# Altium PCB NL_RGB2.0.PcbDoc
Units mil, origin at the board's own origin, x right, y up, seen from the top; angles counter-clockwise.
Board outline 2598.43 x 2598.43 mil, 2 copper layers (Top Layer, Bottom Layer); 18 components, 40 nets, 56 pads, 35 vias.
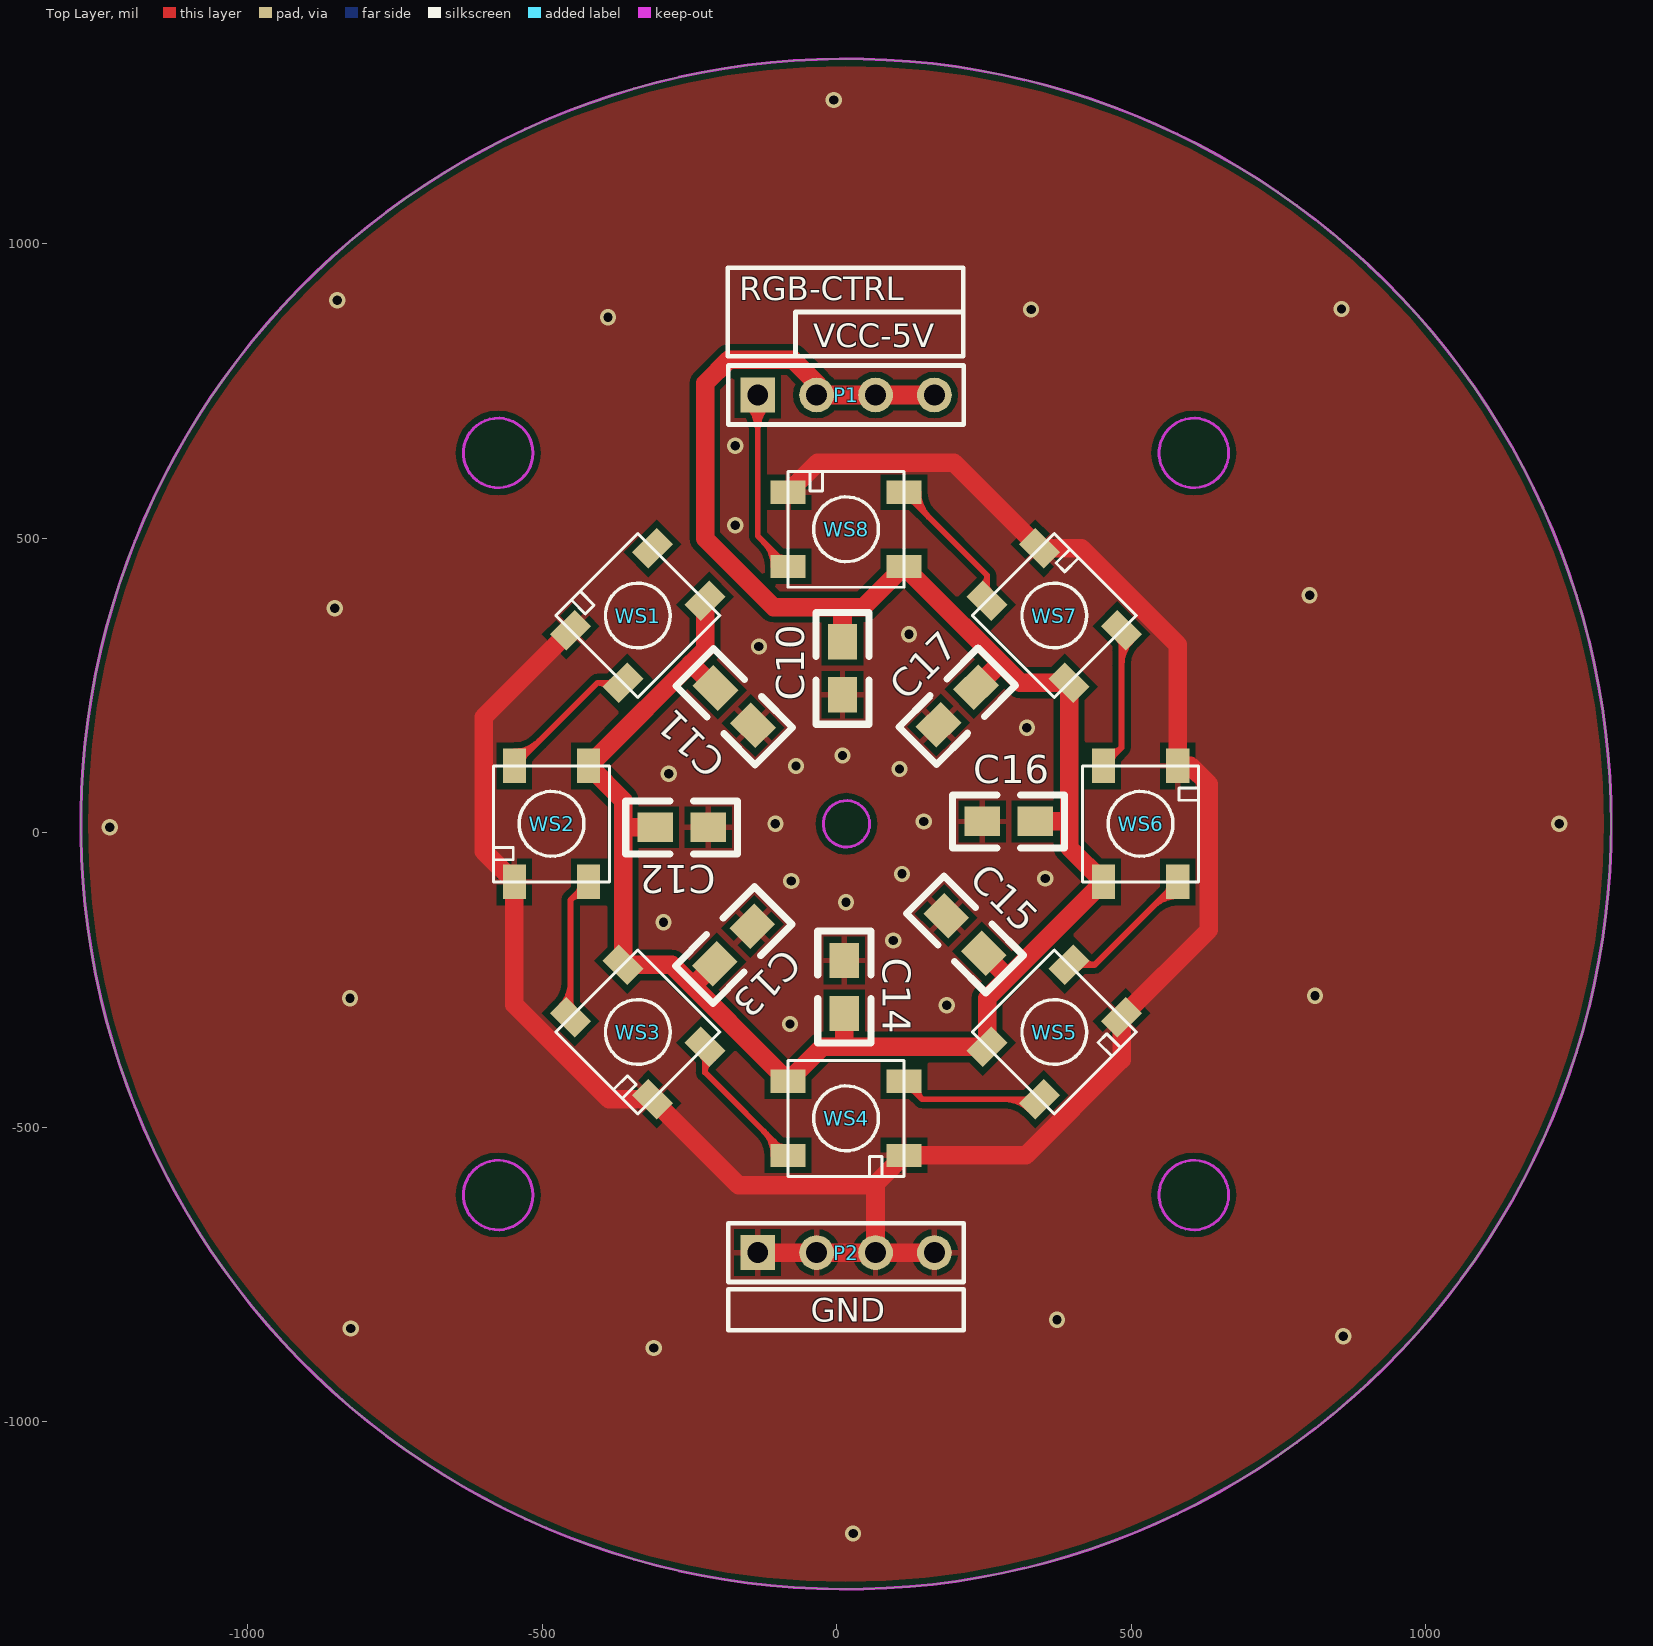
[diagram p0: Top Layer view]
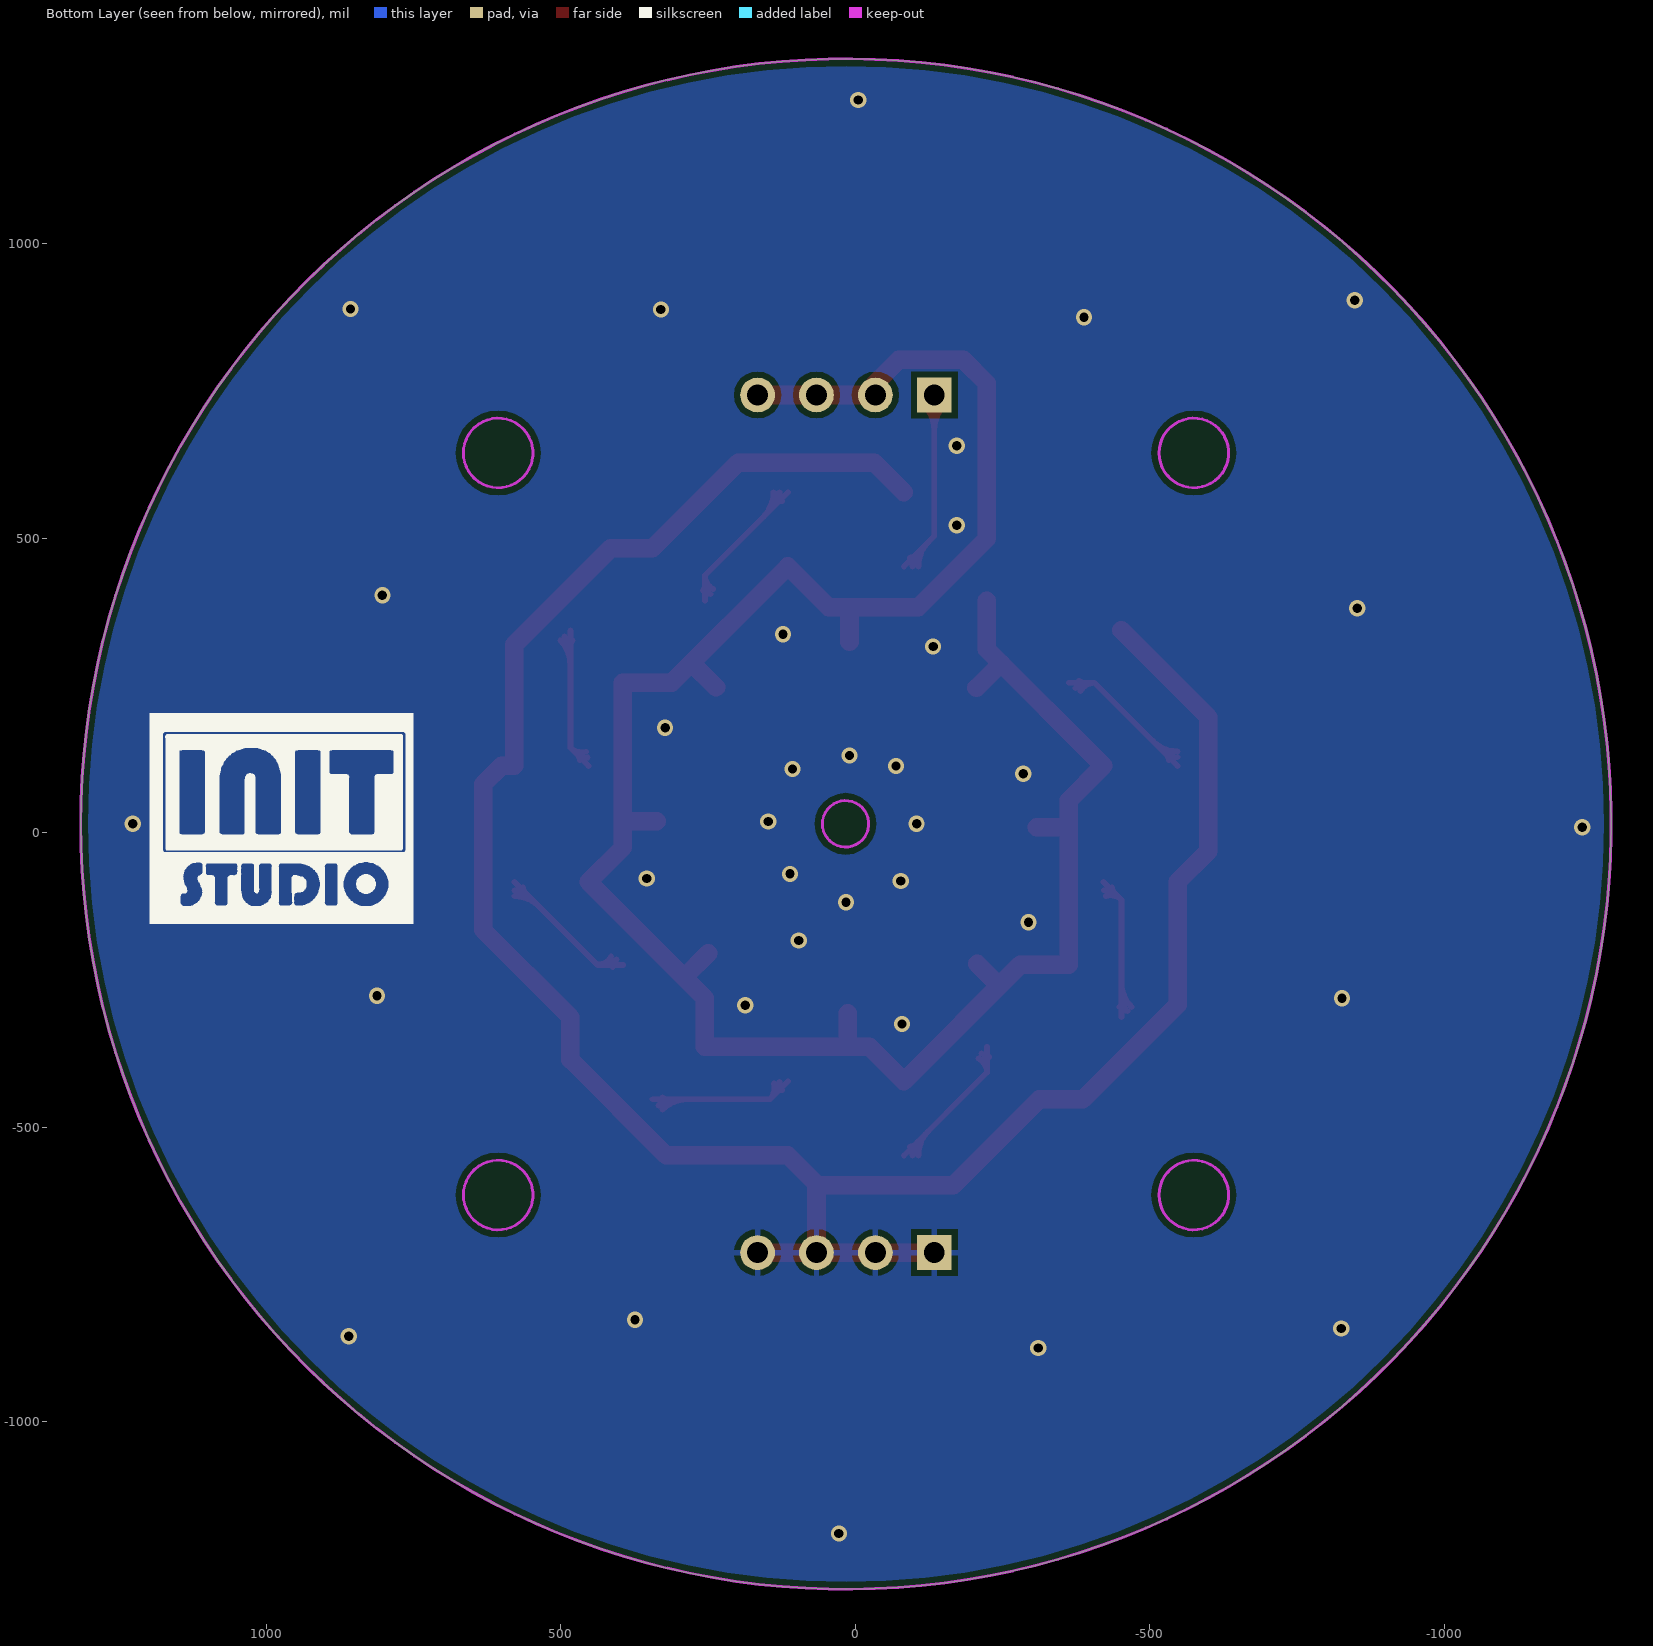
[diagram p1: Bottom Layer view, seen from below]

## Layer stack, top to bottom
Top Solder: solder mask 0.4, Solder Resist, Dk 3.5
Top Layer: signal copper 1.4
Dielectric1: dielectric 12.6, FR-4, Dk 4.8
Bottom Layer: signal copper 1.4
Bottom Solder: solder mask 0.4, Solder Resist, Dk 3.5

## Board outline
-1283.31,14.68 ccw(c15.91,14.68) 15.91,-1284.54 ccw(c15.91,14.68) 1315.12,14.68 ccw(c15.91,14.68) 15.91,1313.89 ccw(c15.91,14.68)

## Design rules (kind name [scope] priority, off if disabled: settings)
Clearance [All] p1: gap=10
ComponentClearance [All] p1: gap=0 collisioncheckmode=3 verticalgap=0 showdistances=FALSE
PolygonConnect PolygonConnect_1 [IsVia] p1: connectstyle=Direct reliefconductorwidth=10 reliefentries=4 polygonreliefangle="90 Angle" airgapwidth=10
PolygonConnect [All] p2: connectstyle=Relief reliefconductorwidth=10 reliefentries=4 polygonreliefangle="90 Angle" airgapwidth=10
RoutingVias [All] p1: holewidth=28 width=50 viastyle="Through Hole" minholewidth=28 minwidth=50 maxholewidth=28 maxwidth=50
SilkToSolderMaskClearance SilkscreenOverComponentPads [IsPad] p1: minsilkscreentomaskgap=10 clearancetoexposedcopper=TRUE
SolderMaskExpansion [All] p1: expansion=4
Width [All] p1: maxlimit=39.37 minlimit=10 preferedwidth=10
28 further rules are at their usual default settings.

## Components (designator, comment, footprint, x,y, rotation, side; value= is the part's Value field where it differs from the comment)
C10 "Cap" 0805 10,234 r90 top
C11 "Cap" 0805 -142,182 r135 top
C12 "Cap" 0805 -218,9 r180 top
C13 "Cap" 0805 -143,-159 r225 top
C14 "Cap" 0805 13,-217 r270 top
C15 "Cap" 0805 186,-141 r315 top
C16 "Cap" 0805 247,19 r0 top
C17 "Cap" 0805 173,183 r45 top
P1 "Header 4" HDR1X4 -134,743 r0 top
P2 "Header 4" HDR1X4 -134,-713 r0 top
WS1 "WS2812" WS2812 -337.55,368.55 r225 top
WS2 "WS2812" WS2812 -484,15 r270 top
WS3 "WS2812" WS2812 -337.55,-338.55 r315 top
WS4 "WS2812" WS2812 16,-485 r0 top
WS5 "WS2812" WS2812 369.55,-338.55 r45 top
WS6 "WS2812" WS2812 516,15 r90 top
WS7 "WS2812" WS2812 369.55,368.55 r135 top
WS8 "WS2812" WS2812 16,515 r180 top

## Footprints (in the part's own frame and the unit in brackets; to place one, negate y for a bottom-side part, rotate by r counter-clockwise, add the part's x,y. Pads: shape width x height; smd on the part's side, far side on the other; paste and mask are expansions set on the pad)
0805 [mil]
  rect 60x50 smd: 1(0,0) 2(90,0)
  silkscreen extent -50,-45 140,45
HDR1X4 [mm] "Connector; Header; 4 Position"
  rect 1.5x1.5 hole 0.9: 1(0,0)
  round 1.5 hole 0.9: 2(2.54,0) 3(5.08,0) 4(7.62,0)
  silkscreen extent -1.27,-1.27 8.89,1.27
WS2812 [mm]
  rect 1.5x1 smd: 1(-2.5,1.6) 2(-2.5,-1.6) 3(2.5,-1.6) 4(2.5,1.6)
  silkscreen extent -2.5,-2.5 2.5,2.5

## Part data
C10 C11 C12 C13 C14 C15 C16 C17: "Capacitor"
P1 P2: "Header, 4-Pin"

## Via types
v1: diameter 27.56, hole 15.75, Top Layer to Bottom Layer, 35 vias

## Nets (pads, with @x,y where several pads share a name; then routed paths per layer and width w, separated by ;. In a path a pad name is that pad's centre, name@x,y a point inside that pad or via, vN(x,y) a via of type N, cw(c..) or ccw(c..) an arc to the next point about the centre after c; other vN are vias at no path point)
5V: C10.2 C11.2 C12.2 C13.2 C14.2 C15.2 C16.2 C17.2 P1.2 P1.3 P1.4 WS1.1 WS2.1 WS3.1 WS4.1 WS5.1 WS6.1 WS7.1 WS8.1 | length 4088.6
  Top Layer w31.5: -356.61,9 C12.2 ; -247.22,287.22 C11.2 ; -241.43,-257.43 C13.2 ; WS1.1 -223.41,311.02 WS2.1 -362.61,55.03 WS3.1 -280.02,-224.41 WS4.1 -24.03,-363.61 WS5.1 255.41,-281.02 WS6.1 394.61,-25.03 WS7.1 312.02,254.41 WS8.1 45.42,383 -107,383 -223.41,499.41 -223.41,762.59 -183,803 -74,803 -34,763 P1.2 P1.4 ; C10.2 10,382 ; 13,-359.61 C14.2 ; C17.2 277.72,287.72 ; C15.2 289.22,-244.22 ; C16.2 389.61,19
BOOT0: 
CH340_RX: 
CH340_TX: 
GND: C10.1 C11.1 C12.1 C13.1 C14.1 C15.1 C16.1 C17.1 P2.1 P2.2 P2.3 P2.4 WS1.3 WS2.3 WS3.3 WS4.3 WS5.3 WS6.3 WS7.3 WS8.3 | length 3986.3
  Top Layer w31.5: WS1.3 -599,196.19 -599,-31.42 WS2.3 -546.99,-292.01 -386.31,-452.69 WS3.3 -166.19,-599 63.42,-599 WS4.3 321.01,-547.99 483.69,-385.31 WS5.3 632,-165.19 632,82 600.57,113.43 WS6.3 578.99,319.01 415.31,482.69 WS7.3 199.19,628 -32.42,628 WS8.3 ; P2.1 P2.2 P2.4 ; P2.3 66,-601.58
  other v1: 28,-1190 -310.5,-875 860,-855 -825,-841.81 374,-827 -79,-325 187,-293 -826,-281 812,-277 96,-183 -294,-152 16,-118 -77,-82 354,-78 111,-70 -1234,9 -104,15 1227,15 148,19 -285,100 106.81,108 -69,113 10,131 323,178 -132,316 123,337 -852,381 803,403 -172,522 -172,657 -388,875 330.19,888 857,889 -848,904 -5,1244
KEY1_PAD: 
KEY2_PAD: 
LED1: 
LED2: 
LED3: 
LED4: 
MCU_RTS: 
NET2: WS1.2
NetD1_1: 
NetD2_1: 
NetD3_1: 
NetD4_1: 
NetD5_2: 
NetQ1_b: 
NetQ1_e: 
NetQ2_B: 
NetQ2_C: 
NetR3_2: 
NetR4_2: 
NetR9_1: 
NetWS1_4: WS1.4 WS2.2 | length 382.8
  Top Layer w10: WS2.2 -406,254.41 ; WS2.2@-546.99,127.95 ccw(c-546.99,163.03) -522.19,138.23 ; WS2.2@-546.99,137.95 ccw(c-546.99,197.17) -505.12,155.3 ; WS2.2@-532.31,123.27 cw(c-520.62,123.27) WS2.2@-528.88,131.53 ; WS1.4@-389.17,254.41 cw(c-389.17,236.78) WS1.4@-373.68,245.21 ; WS1.4@-388.22,254.41 ccw(c-388.22,266.1) WS1.4@-379.95,257.84 ; WS1.4@-382.46,240.43 ccw(c-406,227.61) -406,254.41 ; WS1.4 -406,254.41
NetWS2_4: WS2.4 WS3.2 | length 382.8
  Top Layer w10: WS3.2@-469.04,-296.15 ccw(c-510.91,-254.28) -451.69,-254.28 ; WS3.2@-461.97,-303.23 ccw(c-486.77,-278.43) -451.69,-278.43 ; WS3.2 -451.69,-114.11 ; WS3.2@-451.69,-287.89 ccw(c-440,-287.89) WS3.2@-448.27,-296.15 ; WS2.4@-439.79,-102.21 cw(c-427.32,-114.68) WS2.4@-422.33,-97.76 ; WS2.4@-439.12,-101.53 ccw(c-447.38,-93.27) WS2.4@-435.69,-93.27 ; WS2.4@-425.16,-107.35 ccw(c-432.74,-133.06) -451.69,-114.11 ; WS2.4 -451.69,-114.11
NetWS3_4: WS3.4 WS4.2 | length 384
  Top Layer w10: WS3.4@-226.84,-380.95 cw(c-235.1,-389.22) WS3.4@-223.41,-389.22 ; -223.41,-407.66 cw(c-195.49,-407.66) WS3.4@-209.23,-383.35 ; WS3.4@-223.41,-390.52 cw(c-205.18,-390.52) WS3.4@-214.15,-374.65 ; WS3.4 -223.41,-407 WS4.2 ; -124.3,-506.12 cw(c-166.17,-547.99) WS4.2@-106.95,-547.99 ; -107.23,-523.19 cw(c-132.03,-547.99) WS4.2@-96.95,-547.99 ; WS4.2@-100.53,-529.88 ccw(c-92.27,-521.62) WS4.2@-92.27,-533.31
NetWS4_4: WS4.4 WS5.2 | length 382.8
  Top Layer w10: WS4.4 145.11,-452.69 ; WS4.4@124.27,-436.69 cw(c124.27,-448.38) WS4.4@132.53,-440.12 ; WS4.4@128.76,-423.33 ccw(c145.68,-428.32) WS4.4@133.21,-440.79 ; WS4.4@138.35,-426.16 ccw(c164.06,-433.74) 145.11,-452.69 ; 285.28,-452.69 cw(c285.28,-511.91) WS5.2@327.15,-470.04 ; 309.43,-452.69 cw(c309.43,-487.77) WS5.2@334.23,-462.97 ; WS5.2@318.89,-452.69 ccw(c318.89,-441) WS5.2@327.15,-449.27 ; WS5.2 145.11,-452.69
NetWS5_4: WS5.4 WS6.2 | length 382.8
  Top Layer w10: WS5.4 438,-224.41 ; WS5.4@405.68,-215.21 ccw(c421.17,-206.78) WS5.4@421.17,-224.41 ; WS5.4@411.95,-227.84 cw(c420.22,-236.1) WS5.4@420.22,-224.41 ; WS5.4@414.46,-210.43 ccw(c438,-197.61) 438,-224.41 ; 537.12,-125.3 cw(c578.99,-167.17) WS6.2@578.99,-107.95 ; 554.19,-108.23 cw(c578.99,-133.03) WS6.2@578.99,-97.95 ; WS6.2@560.88,-101.53 ccw(c552.62,-93.27) WS6.2@564.31,-93.27 ; WS6.2 438,-224.41
NetWS6_4: WS6.4 WS7.2 | length 382.8
  Top Layer w10: WS6.4 483.69,144.11 ; WS6.4@454.33,127.76 ccw(c459.32,144.68) WS6.4@471.79,132.21 ; WS6.4@457.16,137.35 ccw(c464.74,163.06) 483.69,144.11 ; WS6.4@467.69,123.27 cw(c479.38,123.27) WS6.4@471.12,131.53 ; WS7.2@480.27,326.15 cw(c472,317.89) WS7.2@483.69,317.89 ; 483.69,284.28 cw(c542.91,284.28) WS7.2@501.04,326.15 ; 483.69,308.43 cw(c518.77,308.43) WS7.2@493.97,333.23 ; WS7.2 483.69,144.11
NetWS7_4: WS7.4 WS8.2 | length 382.8
  Top Layer w10: WS8.2 255.41,437 ; WS8.2@124.27,563.31 cw(c124.27,551.62) WS8.2@132.53,559.88 ; WS8.2@128.95,577.99 ccw(c164.03,577.99) 139.23,553.19 ; WS8.2@138.95,577.99 ccw(c198.17,577.99) 156.3,536.12 ; WS7.4@241.43,413.46 ccw(c228.61,437) 255.41,437 ; WS7.4@246.21,404.68 ccw(c237.78,420.17) WS7.4@255.41,420.17 ; WS7.4 255.41,437 ; WS7.4@255.41,419.22 ccw(c267.1,419.22) WS7.4@258.84,410.95
PA0: 
PA1: 
RGB_CTRL: P1.1 WS8.4 | length 543.7
  Top Layer w10: P1.1@-151.34,725.66 cw(c-193.21,683.79) -134,683.79 cw(c-74.79,683.79) P1.1@-116.66,725.66 ; P1.1@-144.27,732.73 cw(c-169.07,707.93) -134,707.93 cw(c-98.93,707.93) P1.1@-123.73,732.73 ; P1.1 -134,503.58 WS8.4 ; -124.3,493.88 cw(c-166.17,452.01) WS8.4@-106.95,452.01 ; -107.23,476.81 cw(c-132.03,452.01) WS8.4@-96.95,452.01 ; WS8.4@-100.53,470.12 ccw(c-92.27,478.38) WS8.4@-92.27,466.69
SWCLK: 
SWDIO: 
UD+: 
UD-: 
VCC: 

## Polygon pours and split planes (outlines as drawn)
GND on Top Layer "Top Layer-No Net" (solid, remove dead copper, pour order 4): -1477,1450 -1526,1401 -1526,-1559 1710,-1559 1735,-1534 1796,-1473 1796,1531
GND on Bottom Layer "Top Layer-No Net" (solid, remove dead copper, pour order 6): -1481,1515 -1481,-1681 -1534,-1734 -1460,-1660 1938,-1660 1938,1568

## Keep-outs
Keep-Out Layer:
  circle w5: c16.63,15 r39.37
  circle w5: c606.46,644.6 r59.06
  circle w5: c-574.65,644.6 r59.06
  circle w5: c-574.65,-615.25 r59.06
  circle w5: c606.46,-615.25 r59.06
  circle w5: c15.91,14.68 r1299.21

## Silkscreen, mask and mechanical layers (free items; w line width, h text height)
Top Overlay:
  lines w8: -70,809 -70,884 215,884 ; 215,884 215,809 -185,809 -185,884 -185,959 215,959 215,884 ; -184,-845 216,-845 216,-775 -184,-775 -184,-845
  text "RGB-CTRL" at -165,904 h40
  text "VCC-5V" at -40,824 h40
  text "GND" at -44,-830 h40
Bottom Overlay:
  drawing of 2869 lines, arcs and shapes, not listed